# EAGLE board ESP-12_Breakout_SMT (EAGLE 7.4.0)
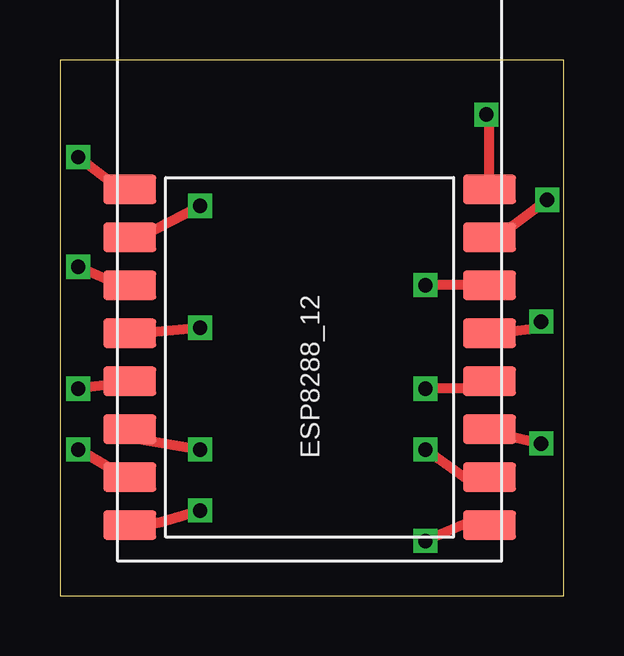
[diagram p0: board, top side]
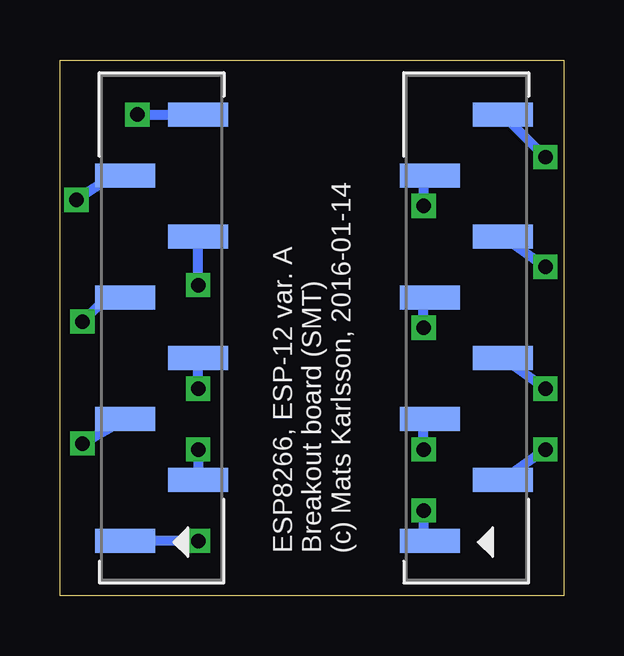
[diagram p1: board, bottom side, seen from below]

Size 21.01 x 22.34 mm. Coordinates in mm from the lower left corner, seen from the top.
Outline: 0,0 21.01,0 21.01,22.34 0,22.34 0,0
Copper layers (1*16): Top 0.035mm / dielectric 1.5mm / Bottom 0.035mm
Design rules "default": minimum track width 10mil, minimum drill 24mil, track to track 8mil, track to pad 8mil, pad to pad 8mil, via to via 8mil, smd to smd 8mil, copper to edge 40mil, drill to drill 8mil, minimum pad ring 10mil, minimum via ring 8mil, stop-mask expansion 4mil, vias tented up to drill 0mil, thermal gap 10mil

## Footprints (pad centres in the part's own frame; a part is rotated, then mirrored left to right if it is on the bottom)
ESP8266-12 = smd 2.2 x 1.2: 1 -7.5,4.5; 2 -7.5,2.5; 3 -7.5,0.5; 4 -7.5,-1.5; 5 -7.5,-3.5; 6 -7.5,-5.5; 7 -7.5,-7.5; 8 -7.5,-9.5; 9 7.5,-9.5; 10 7.5,-7.5; 11 7.5,-5.5; 12 7.5,-3.5; 13 7.5,-1.5; 14 7.5,0.5; 15 7.5,2.5; 16 7.5,4.5
1X08_SMT = smd 1 x 2.5: 1 -8.89,1.52; 2 -6.35,-1.52; 3 -3.81,1.52; 4 -1.27,-1.52; 5 1.27,1.52; 6 3.81,-1.52; 7 6.35,1.52; 8 8.89,-1.52

## Placement (x,y rotation side)
ESP8288_12  ESP8266-12  [ESP8266-12]  10.41,12.45 0 top
JP1  [1X08_SMT]  4.06,11.18 90 bottom
JP2  [1X08_SMT]  16.76,11.18 90 bottom

## Library data of the parts
ESP8288_12 = we-chip
JP1 JP2 = pinhead+

## Nets
ADC: ESP8288_12.2 JP1.7
EN: ESP8288_12.3 JP1.6
GND: ESP8288_12.9 JP2.1
GPIO0: ESP8288_12.12 JP2.4
GPIO1(TX): ESP8288_12.16 JP2.8
GPIO2: ESP8288_12.11 JP2.3
GPIO3(RX): ESP8288_12.15 JP2.7
GPIO4: ESP8288_12.13 JP2.5
GPIO5: ESP8288_12.14 JP2.6
GPIO12: ESP8288_12.6 JP1.3
GPIO13: ESP8288_12.7 JP1.2
GPIO14: ESP8288_12.5 JP1.4
GPIO15: ESP8288_12.10 JP2.2
GPIO16: ESP8288_12.4 JP1.5
RESET: ESP8288_12.1 JP1.8
VCC: ESP8288_12.8 JP1.1

## Tracks (layer width: path | path; a pad name or v marks a point on that pad's centre or on a via)
ADC  (via drill 0.6)
  Top 0.406: ESP8288_12.2 3.3,14.95 v5.84,16.26
  Bottom 0.406: v5.84,16.26 5.84,17.02 JP1.7
EN  (via drill 0.6)
  Top 0.406: ESP8288_12.3 2.54,12.95 v0.76,13.72
  Bottom 0.406: v0.76,13.72 JP1.6
GND  (via drill 0.6)
  Top 0.406: ESP8288_12.9 17.81,3.05 17.02,3.05 v15.24,2.29
  Bottom 0.406: v15.24,2.29 JP2.1
GPIO0  (via drill 0.6)
  Top 0.406: ESP8288_12.12 17.91,8.64 v15.24,8.64
  Bottom 0.406: v15.24,8.64 JP2.4
GPIO1(TX)  (via drill 0.6)
  Top 0.406: ESP8288_12.16 17.91,19.81 v17.78,20.07
  Bottom 0.406: v17.78,20.07 JP2.8
GPIO2  (via drill 0.6)
  Top 0.406: ESP8288_12.11 17.91,6.86 v20.07,6.35
  Bottom 0.406: v20.07,6.35 JP2.3
GPIO3(RX)  (via drill 0.6)
  Top 0.406: ESP8288_12.15 17.91,14.99 18.29,14.99 v20.32,16.51
  Bottom 0.406: v20.32,16.51 18.8,17.53 JP2.7
GPIO4  (via drill 0.6)
  Top 0.406: ESP8288_12.13 17.91,10.92 20.07,11.18 v20.07,11.43
  Bottom 0.406: v20.07,11.43 19.3,12.19 JP2.5
GPIO5  (via drill 0.6)
  Top 0.406: ESP8288_12.14 v15.24,12.95
  Bottom 0.406: v15.24,12.95 JP2.6
GPIO12  (via drill 0.6)
  Top 0.406: ESP8288_12.6 2.91,6.6 v5.84,6.1
  Bottom 0.406: v5.84,6.1 5.84,7.37 JP1.3
GPIO13  (via drill 0.6)
  Top 0.406: ESP8288_12.7 2.91,4.83 v0.76,6.1
  Bottom 0.406: v0.76,6.1 JP1.2
GPIO14  (via drill 0.6)
  Top 0.406: ESP8288_12.5 2.91,8.89 v0.76,8.64
  Bottom 0.406: v0.76,8.64 JP1.4
GPIO15  (via drill 0.6)
  Top 0.406: ESP8288_12.10 17.91,4.83 17.02,4.83 v15.24,6.1
  Bottom 0.406: v15.24,6.1 JP2.2
GPIO16  (via drill 0.6)
  Top 0.406: ESP8288_12.4 2.91,10.92 v5.84,11.18
  Bottom 0.406: v5.84,11.18 5.84,12.45 JP1.5
RESET  (via drill 0.6)
  Top 0.406: ESP8288_12.1 2.54,16.95 v0.76,18.29
  Bottom 0.406: v0.76,18.29 JP1.8
VCC  (via drill 0.6)
  Top 0.406: ESP8288_12.8 2.91,3.05 4.06,3.05 v5.84,3.56
  Bottom 0.406: v5.84,3.56 5.84,2.29 JP1.1

## Text on the board
bNames: ESP8266, ESP-12 var. A / Breakout board (SMT) / (c) Mats Karlsson, 2016-01-14